# Altium PCB DevKit.PcbDoc (part 2 of 2)
Units mil, origin at the board's own origin, x right, y up, seen from the top; angles counter-clockwise.
Board outline 6000 x 4000 mil, 2 copper layers (Top Layer, Bottom Layer); 69 components, 227 nets, 1587 pads, 0 vias.
Unrouted connection lines stored in the file: 824.
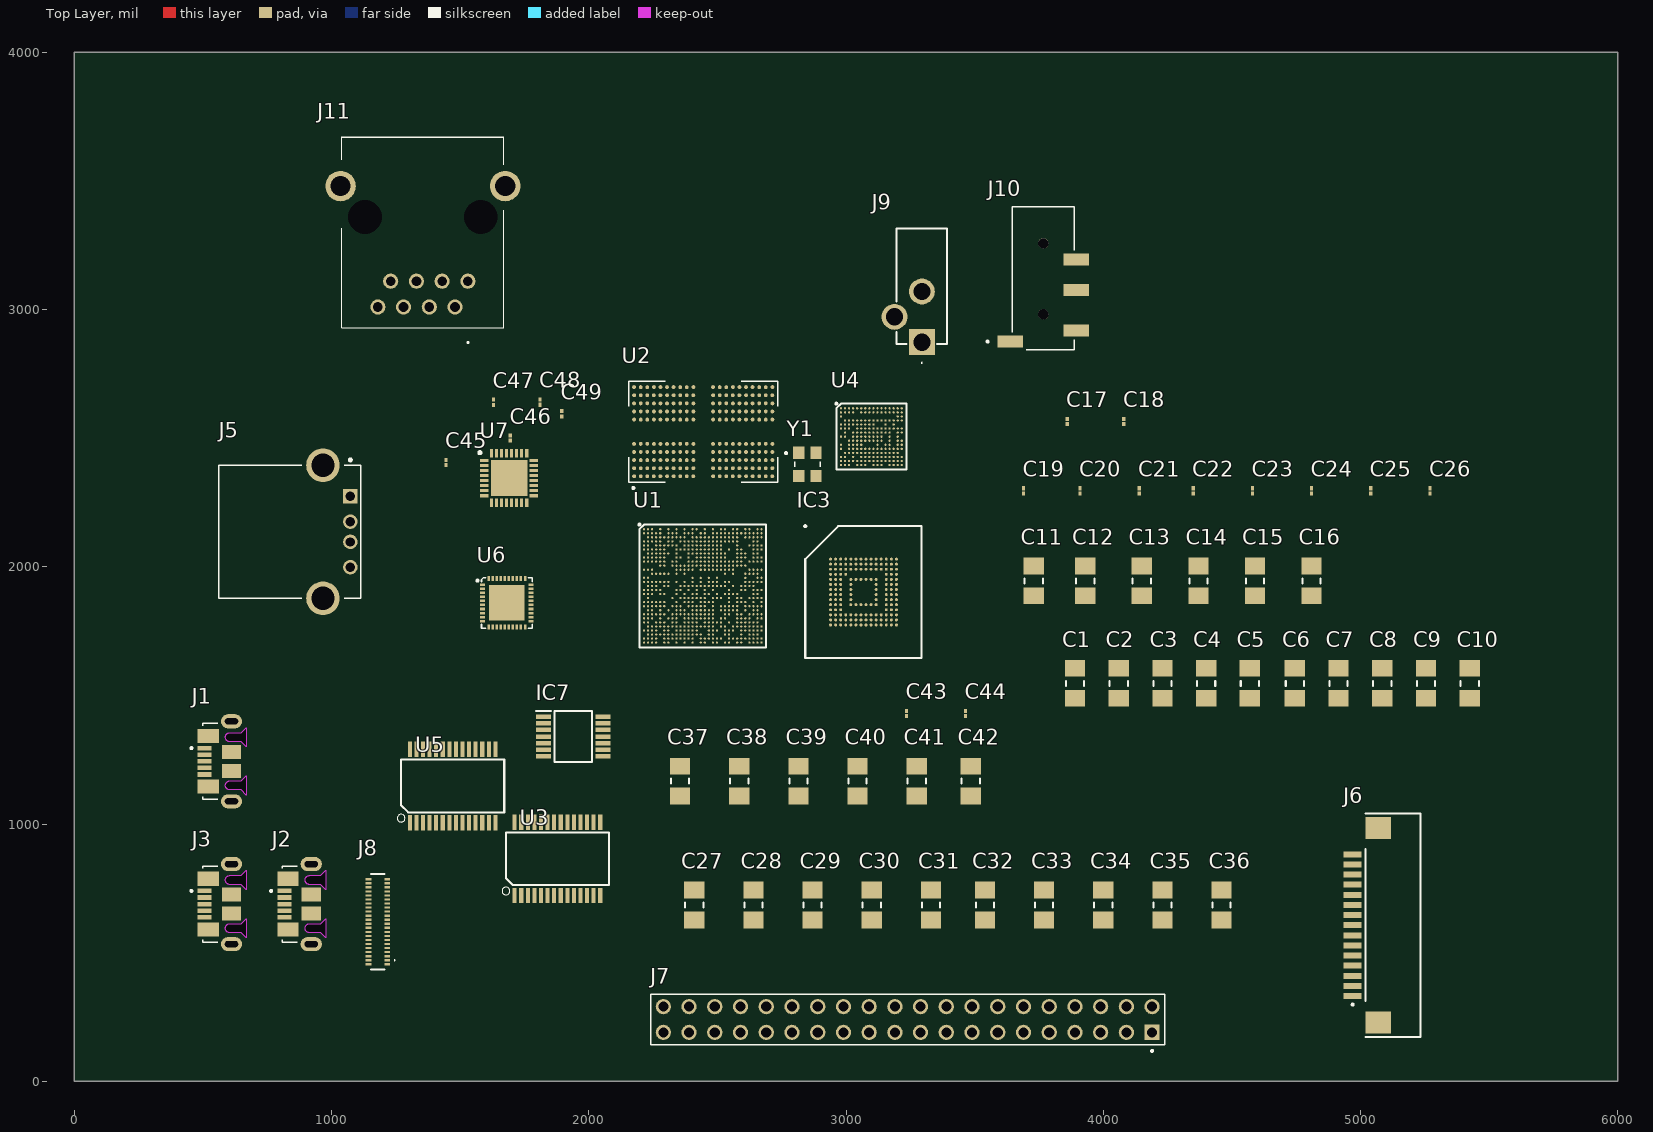
[diagram p0: Top Layer view]

## Nets (pads, with @x,y where several pads share a name; then routed paths per layer and width w, separated by ;. In a path a pad name is that pad's centre, name@x,y a point inside that pad or via, vN(x,y) a via of type N, cw(c..) or ccw(c..) an arc to the next point about the centre after c; other vN are vias at no path point) (continued)
pads on no net: IC3.A1 IC3.A2 IC3.A7 IC3.A8 IC3.A9 IC3.A10 IC3.A11 IC3.A12 IC3.A13 IC3.A14 IC3.B1 IC3.B7 IC3.B8 IC3.B9 IC3.B10 IC3.B11 IC3.B12 IC3.B13 IC3.B14 IC3.C1 IC3.C2 IC3.C3 IC3.C5 IC3.C7 IC3.C8 IC3.C9 IC3.C10 IC3.C11 IC3.C12 IC3.C13 IC3.C14 IC3.D1 IC3.D2 IC3.D3 IC3.D4 IC3.D12 IC3.D13 IC3.D14 IC3.E1 IC3.E2 IC3.E3 IC3.E5 IC3.E8 IC3.E9 IC3.E10 IC3.E12 IC3.E13 IC3.E14 IC3.F1 IC3.F2 IC3.F3 IC3.F10 IC3.F12 IC3.F13 IC3.F14 IC3.G1 IC3.G2 IC3.G3 IC3.G10 IC3.G12 IC3.G13 IC3.G14 IC3.H1 IC3.H2 IC3.H3 IC3.H12 IC3.H13 IC3.H14 IC3.J1 IC3.J2 IC3.J3 IC3.J12 IC3.J13 IC3.J14 IC3.K1 IC3.K2 IC3.K3 IC3.K6 IC3.K7 IC3.K10 IC3.K12 IC3.K13 IC3.K14 IC3.L1 IC3.L2 IC3.L3 IC3.L12 IC3.L13 IC3.L14 IC3.M1 IC3.M2 IC3.M3 IC3.M7 IC3.M8 IC3.M9 IC3.M10 IC3.M11 IC3.M12 IC3.M13 IC3.M14 IC3.N1 IC3.N3 IC3.N6 IC3.N7 IC3.N8 IC3.N9 IC3.N10 IC3.N11 IC3.N12 IC3.N13 IC3.N14 IC3.P1 IC3.P2 IC3.P7 IC3.P8 IC3.P9 IC3.P10 IC3.P11 IC3.P12 IC3.P13 IC3.P14 IC7.1 IC7.2 IC7.3 IC7.4 IC7.5 IC7.6 IC7.7 IC7.8 IC7.9 IC7.10 IC7.11 IC7.12 IC7.13 IC7.14 J1.1 J1.4 J2.4 J3.4 J6.01 J6.02 J6.03 J6.04 J6.05 J6.06 J6.07 J6.08 J6.09 J6.10 J6.11 J6.12 J6.13 J6.14 J6.15 J6.S1 J6.S2 J7.1 J7.2 J7.3 J7.4 J7.5 J7.6 J7.7 J7.8 J7.9 J7.10 J7.11 J7.12 J7.13 J7.14 J7.15 J7.16 J7.17 J7.18 J7.19 J7.20 J7.21 J7.22 J7.23 J7.24 J7.25 J7.26 J7.27 J7.28 J7.29 J7.30 J7.31 J7.32 J7.33 J7.34 J7.35 J7.36 J7.37 J7.38 J7.39 J7.40 J8.1 J8.2 J8.3 J8.4 J8.5 J8.6 J8.7 J8.8 J8.9 J8.10 J8.11 J8.12 J8.13 J8.14 J8.15 J8.16 J8.17 J8.18 J8.19 J8.20 J8.21 J8.22 J8.23 J8.24 J8.25 J8.26 J8.27 J8.28 J8.29 J8.30 J8.31 J8.32 J8.33 J8.34 J8.35 J8.36 J8.37 J8.38 J8.39 J8.40 J8.41 J8.42 J8.43 J8.44 J10. J10.4 J11.1 J11.2 J11.3 J11.4 J11.5 J11.6 J11.7 J11.8 J11.MH1 J11.MH2 J11.MH3 J11.MH4 U1.AA2 U1.AA3 U1.AA5 U1.AA18 U1.AA24 U1.AB1 U1.AB2 U1.AB4 U1.AB5 U1.AB13 U1.AB14 U1.AB18 U1.AB22 U1.AB24 U1.AC1 U1.AC2 U1.AC3 U1.AC5 U1.AC13 U1.AC14 U1.AC18 U1.AC24 U1.AC29 U1.AD1 U1.AD4 U1.AD5 U1.AD13 U1.AD14 U1.AD18 U1.AD19 U1.AD24 U1.AD29 U1.AE3 U1.AE4 U1.AE5 U1.AE6 U1.AE13 U1.AE14 U1.AE15 U1.AE23 U1.AE24 U1.AE25 U1.AE29 U1.AE30 U1.AF1 U1.AF2 U1.AF3 U1.AF4 U1.AF6 U1.AF9 U1.AF12 U1.AF13 U1.AF14 U1.AF25 U1.AF26 U1.AF27 U1.AF28 U1.AF29 U1.AF30 U1.AG2 U1.AG3 U1.AG4 U1.AG5 U1.AG13 U1.AG14 U1.AG15 U1.AG25 U1.AG27 U1.AG28 U1.AG29 U1.AH1 U1.AH2 U1.AH3 U1.AH4 U1.AH6 U1.AH15 U1.AH16 U1.AH20 U1.AH24 U1.AH25 U1.AH26 U1.AH27 U1.AH28 U1.AH29 U1.AJ1 U1.AJ2 U1.AJ3 U1.AJ4 U1.AJ13 U1.AJ15 U1.AJ16 U1.AJ21 U1.AJ22 U1.AJ24 U1.AJ25 U1.AJ27 U1.AJ28 U1.AJ29 U1.AJ30 U1.F28 U1.L1 U1.L2 U1.L3 U1.M3 U1.M4 U1.M5 U1.M6 U1.M7 U1.M27 U1.N1 U1.N2 U1.P1 U1.P2 U1.P4 U1.P5 U1.P6 U1.P7 U1.P27 U1.P28 U1.P29 U1.R2 U1.R3 U1.R4 U1.R6 U1.R7 U1.R25 U1.R26 U1.R27 U1.R28 U1.T1 U1.T2 U1.T3 U1.T4 U1.U1 U1.U2 U1.U5 U1.U6 U1.U29 U1.V2 U1.V29 U1.V30 U1.W1 U1.W2 U1.W4 U1.W5 U1.W6 U1.W18 U1.W24 U1.W25 U1.W28 U1.W30 U1.Y1 U1.Y3 U1.Y6 U1.Y18 U2.A1 U2.A2 U2.A5 U2.A8 U2.A11 U2.A12 U2.AA1 U2.AA12 U2.AB1 U2.AB2 U2.AB11 U2.AB12 U2.B1 U2.B12 U2.G11 U2.K5 U2.K8 U2.N5 U2.N8 U3.2 U3.3 U3.6 U3.8 U3.9 U3.10 U3.11 U3.12 U3.13 U3.14 U3.24 U3.27 U3.28 U4.A1 U4.A16 U4.D3 U4.E3 U4.E4 U4.E5 U4.E6 U4.F1 U4.F5 U4.G5 U4.G6 U4.G12 U4.H2 U4.H6 U4.H13 U4.J3 U4.J4 U4.J6 U4.J13 U4.K1 U4.K3 U4.K4 U4.K5 U4.K6 U4.K13 U4.L1 U4.L3 U4.L4 U4.L5 U4.L9 U4.M2 U4.M3 U4.M5 U4.M6 U4.M7 U4.M9 U4.M10 U4.M14 U4.M15 U4.N4 U4.N6 U4.N7 U4.N8 U4.N9 U4.N10 U4.N14 U4.N15 U4.N16 U4.P5 U4.P8 U4.P10 U4.P11 U4.P13 U4.P16 U4.R1 U4.R3 U4.R5 U4.R7 U4.R9 U4.R10 U4.R15 U4.R16 U5.2 U5.3 U5.6 U5.8 U5.9 U5.10 U5.11 U5.12 U5.13 U5.14 U5.24 U5.27 U5.28 U6.7 U6.9 U6.11 U6.31 U6.32 U6.34 U6.37 U6.38 U6.39 U7.3 U7.4 U7.5 U7.6 U7.8 U7.11 U7.12 U7.13 U7.18 U7.19 U7.24 U7.25 U7.27 Y1.2 Y1.4